# Altium PCB ATMEGA328 Control Board.PcbDoc (part 2 of 2)
Units mm, origin at the board's own origin, x right, y up, seen from the top; angles counter-clockwise.
Board outline 100 x 100 mm, 4 copper layers (Top Layer, GND, VCC, Bottom Layer), stack 1.586 mm thick; 96 components, 93 nets, 427 pads, 260 vias.
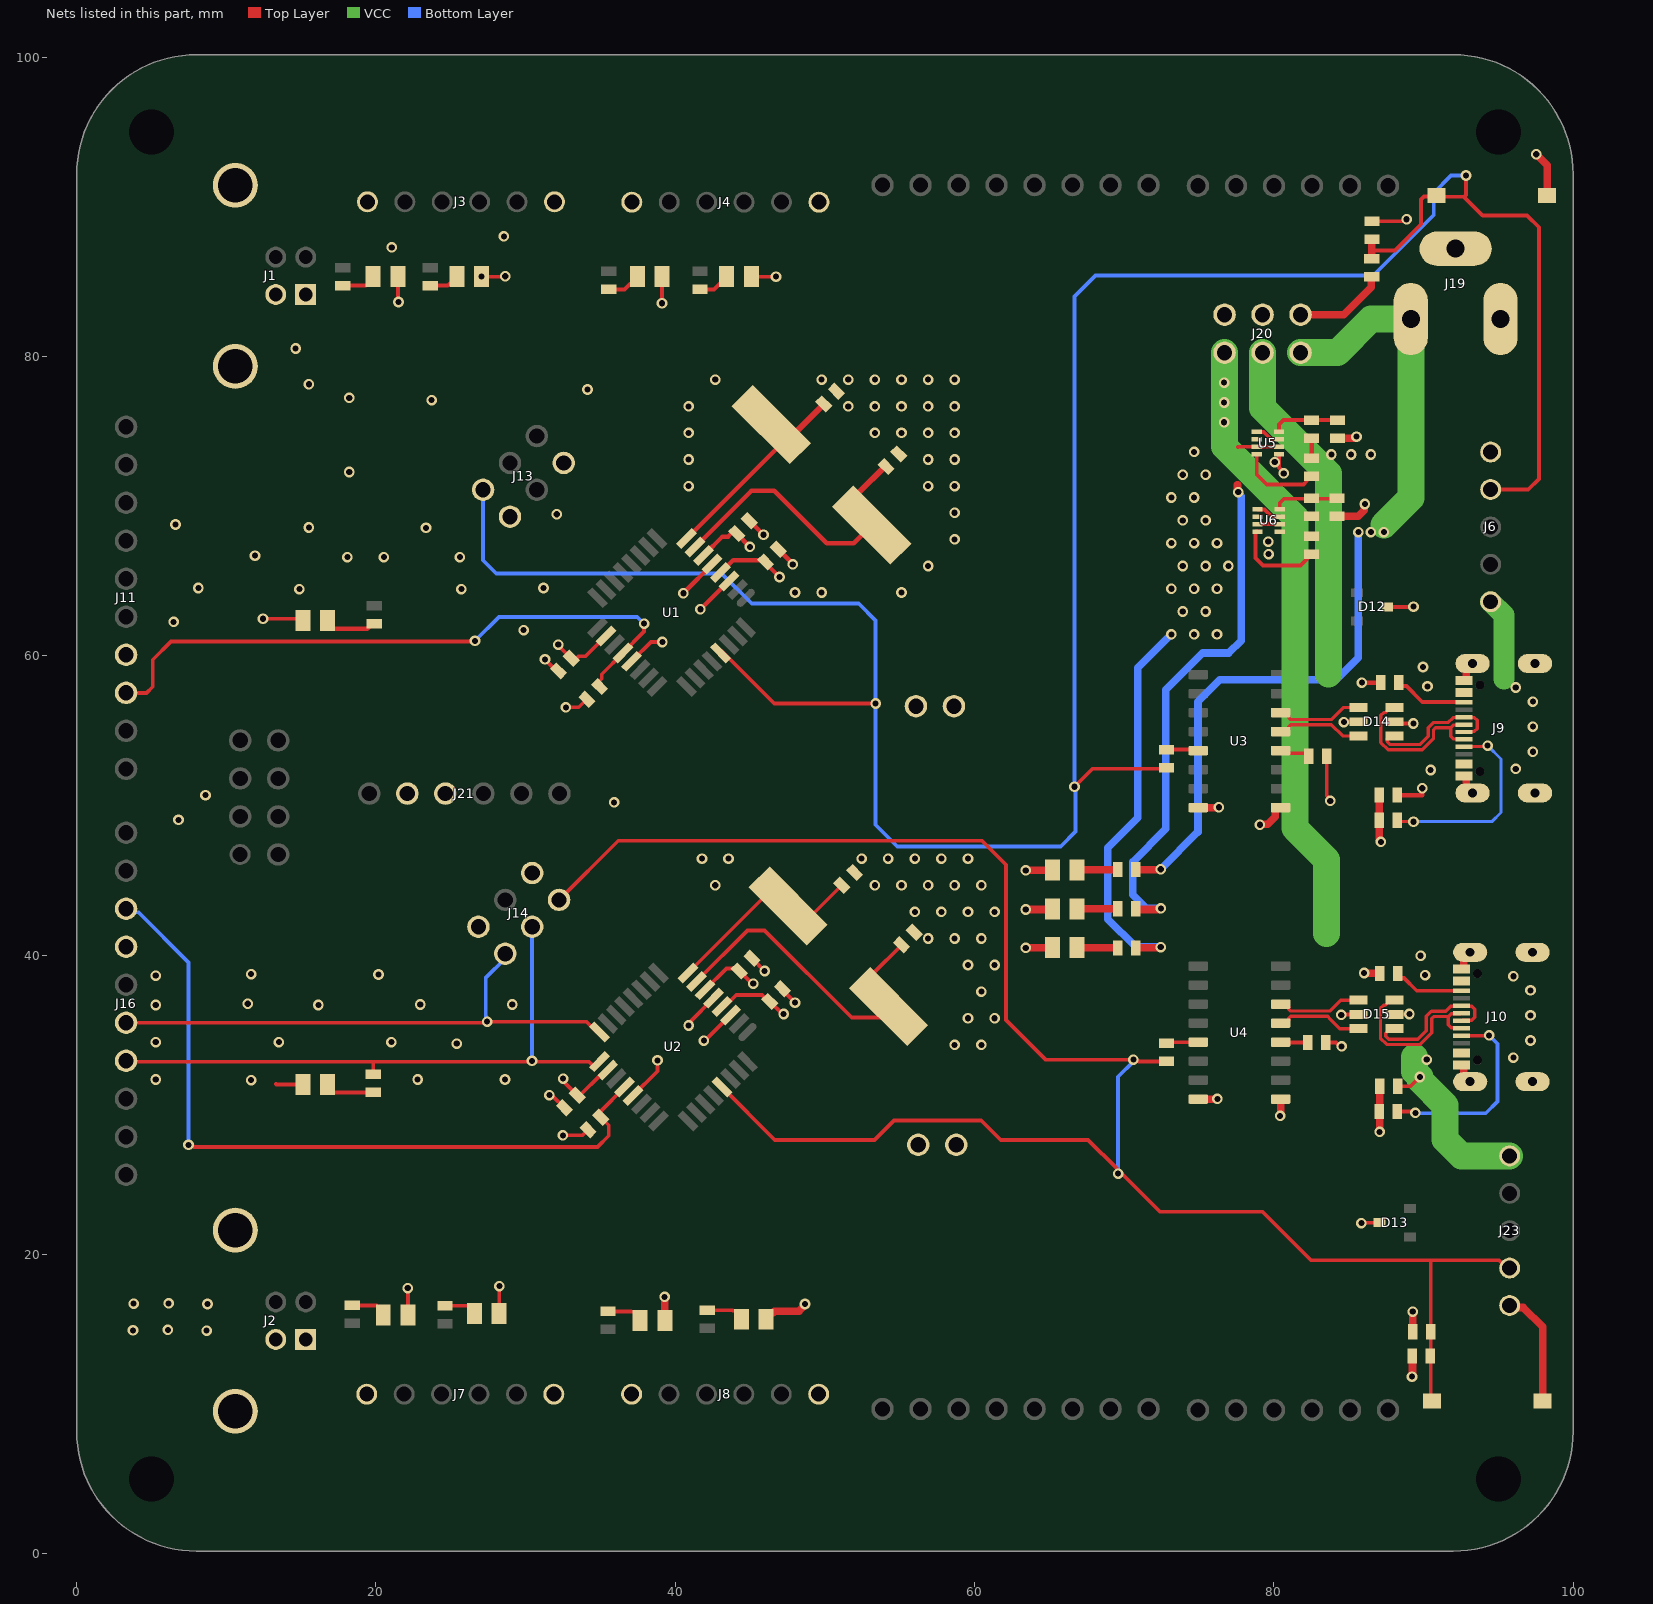
[diagram p4: the nets of this part, all layers, seen from the top]

## Via types
v1: diameter 0.711, hole 0.406, Top Layer to Bottom Layer, tented both sides, 260 vias

## Nets (pads, with @x,y where several pads share a name; then routed paths per layer and width w, separated by ;. In a path a pad name is that pad's centre, name@x,y a point inside that pad or via, vN(x,y) a via of type N, cw(c..) or ccw(c..) an arc to the next point about the centre after c; other vN are vias at no path point) (continued)
2D12/MISO: J14.1 J16.6 U2.16 | length 37.1
  Top Layer w0.254: J16.6@3.302,35.484 27.356,35.484 v1(27.432,35.56) 34.053,35.56 34.75,34.863 U2.16@34.924,34.863
  Bottom Layer w0.254: v1(27.432,35.56) 27.345,35.647 27.345,35.923 27.33,35.937 27.33,38.47 28.642,39.781 J14.1@28.642,40.105
2D13/SCK: J14.3 J16.7 R13.1 U2.17 | length 41.7
  Top Layer w0.254: J16.7@3.302,32.944 3.363,32.883 19.761,32.883 ; R13.1@19.812,32.029 19.812,32.832 19.761,32.883 ; U2.17@34.924,32.883 34.67,32.629 34.496,32.629 34.242,32.883 30.49,32.883 v1(30.429,32.944) 30.368,32.883 19.761,32.883
  Bottom Layer w0.254: v1(30.429,32.944) J14.3@30.429,41.892
+5: J1.1 J2.1 J3.1 J4.1 J5.1 J7.1 J8.1 J20.2 J20.4 J20.6 J21.2 J24.1 R1.1 R2.1 R9.1 U3.16 U4.16 U6.2 U6.7 | length 38.5
  Top Layer w0.254: U6.7@78.914,68.813 U6.2@80.394,68.813
  Top Layer w0.508: R9.1@70.78,40.488 72.335,40.488 72.386,40.538 v1(72.441,40.538) ; U4.16@74.949,30.378 76.2,30.378 v1(76.225,30.404) ; U3.16@74.949,49.86 76.302,49.86 v1(76.327,49.886) ; J20.6@81.788,82.804 84.684,82.804 86.512,84.633 86.512,85.35 86.516,85.354 R1.1@86.538,85.354 ; v1(89.23,11.836) 89.265,11.871 R2.1@89.265,13.208
  Bottom Layer w0.508: v1(72.441,40.538) 72.413,40.567 70.762,40.567 68.91,42.418 68.91,47.168 70.917,49.174 70.917,59.205 v1(73.152,61.44)
  other v1: 74.676,61.44 76.2,61.44 73.914,62.964 75.438,62.964 73.152,64.488 74.676,64.488 76.2,64.488 73.914,66.012 75.438,66.012 76.962,66.012 73.152,67.536 74.676,67.536 76.2,67.536 73.914,69.06 75.438,69.06 73.152,70.584 74.676,70.584 73.914,72.108 75.438,72.108 74.676,73.632
+5_C1: C8.2 C9.2 C10.2 J5.2 J13.2 U1.4 U1.6 U1.18 | length 13.1
  Top Layer w0.254: v1(32.182,60.757) 32.182,60.706 33.146,59.742 33.32,59.742 33.562,59.984 34.022,59.984 U1.18@35.483,61.444
  Top Layer w0.3: U1.6@41.995,66.818 43.155,67.978 43.529,67.978 43.91,68.359 C10.2@44.051,68.359 ; U1.4@43.127,65.687 43.164,65.687 43.86,66.383 45.715,66.383 45.749,66.418 45.891,66.418 C9.2@46.032,66.276 46.032,66.21 v1(46.965,65.278) ; C10.2@44.102,68.181 44.983,67.3 v1(44.983,67.285)
+5_C2: C5.2 C6.2 C7.2 J14.2 J24.2 U2.4 U2.6 U2.18 | length 13.4
  Top Layer w0.254: v1(32.512,31.75) 32.599,31.663 32.599,31.495 C5.2@33.444,30.65 ; C5.2@33.502,30.679 33.676,30.679 34.96,31.964 35.136,31.964 U2.18@35.49,32.317 ; U2.6@41.995,37.691 43.42,39.116 43.936,39.116 43.964,39.087 44.128,39.087 C7.2@44.157,39.116 ; U2.4@43.127,36.56 43.301,36.56 44.079,37.338 45.795,37.338 46.219,36.914 C6.2@46.312,36.914 47.157,36.068 v1(47.244,36.068) ; C7.2@44.138,39.087 45.125,38.1 v1(45.212,38.1)
AREF1: C11.1 J11.3 U1.20 | length 43.5
  Top Layer w0.254: J11.3@3.302,57.531 4.674,57.531 5.08,57.937 5.08,59.741 6.299,60.96 26.568,60.96 v1(26.619,61.011) ; C11.1@34.943,57.955 34.842,58.056 34.842,58.23 35.084,58.472 35.084,58.776 U1.20@36.513,60.205 ; U1.20@36.508,60.21 37.921,61.622 37.921,62.152 v1(37.922,62.154)
  Bottom Layer w0.254: v1(26.619,61.011) 28.219,62.611 37.465,62.611 v1(37.922,62.154)
AREF2: C12.1 J16.3 U2.20 | length 50.3
  Top Layer w0.254: v1(7.468,27.33) 7.555,27.243 7.78,27.243 7.845,27.178 34.798,27.178 35.56,27.94 35.56,28.636 C12.1@35.019,29.177 ; C12.1@34.968,29.38 34.968,29.533 U2.20@36.621,31.186
  Bottom Layer w0.254: J16.3@3.302,43.104 3.54,42.865 4.125,42.865 7.468,39.522 v1(7.468,27.33)
D1_N: D14.3 J9.A7 J9.B7 | length 11.3
  Top Layer w0.222: D14.3@88.069,56.551 87.769,56.551 87.433,56.215 87.339,56.215 87.155,56.031 87.155,54.209 87.636,53.727 89.908,53.727 90.672,54.491 90.672,55.066 90.802,55.196 91.815,55.196 ; J9.B7@92.7,54.416 92.664,54.452 91.999,54.452 91.815,54.636 91.815,55.196 ; J9.A7@92.7,55.416 92.664,55.38 91.999,55.38 91.815,55.196
D1_out_N: D14.4 U3.6 | length 5.8
  Top Layer w0.222: U3.6@80.449,56.21 80.794,56.21 80.993,56.011 80.993,55.88 81.123,55.75 83.839,55.75 84.64,56.551 D14.4@85.669,56.551
D1_out_P: D14.6 U3.5 | length 5.8
  Top Layer w0.222: U3.5@80.449,54.94 80.794,54.94 80.993,55.139 80.993,55.271 81.123,55.401 83.839,55.401 84.589,54.651 D14.6@85.669,54.651
D1_P: D14.1 J9.A6 J9.B6 | length 9.6
  Top Layer w0.222: D14.1@88.069,54.651 87.769,54.651 87.58,54.462 87.58,54.278 87.781,54.077 89.764,54.077 90.322,54.635 90.322,55.211 90.657,55.545 91.638,55.545 91.973,55.88 92.664,55.88 J9.B6@92.7,55.916 92.735,55.88 93.4,55.88 93.584,55.696 93.584,55.136 93.4,54.952 92.735,54.952 J9.A6@92.7,54.916
D2_N: D15.3 J10.A7 J10.B7 | length 11.7
  Top Layer w0.222: D15.3@88.069,36.993 87.769,36.993 87.433,36.657 87.339,36.657 87.126,36.444 87.126,34.445 87.536,34.035 89.774,34.035 90.545,34.806 90.545,35.772 90.675,35.903 91.657,35.903 ; J10.B7@92.541,35.122 92.505,35.158 91.841,35.158 91.657,35.342 91.657,35.903 ; J10.A7@92.541,36.122 92.505,36.087 91.841,36.087 91.657,35.903
D2_out_N: D15.4 U4.6 | length 5.8
  Top Layer w0.222: U4.6@80.449,36.728 80.794,36.728 80.993,36.529 80.993,36.398 81.123,36.268 83.737,36.268 84.462,36.993 D15.4@85.669,36.993
D2_out_P: D15.6 U4.5 | length 5.8
  Top Layer w0.222: U4.5@80.449,35.458 80.794,35.458 80.993,35.657 80.993,35.789 81.123,35.919 83.599,35.919 83.785,35.733 83.785,35.719 84.411,35.093 D15.6@85.669,35.093
D2_P: D15.1 J10.A6 J10.B6 | length 10.1
  Top Layer w0.222: D15.1@88.069,35.093 87.769,35.093 87.475,34.799 87.475,34.59 87.68,34.384 89.629,34.384 90.195,34.95 90.195,35.917 90.53,36.252 91.479,36.252 91.814,36.587 92.505,36.587 J10.B6@92.541,36.622 92.577,36.587 93.241,36.587 93.425,36.403 93.425,35.842 93.241,35.658 92.577,35.658 J10.A6@92.541,35.622
GND: C1.1 C2.1 C3.1 C4.1 C5.1 C6.1 C7.1 C8.1 C9.1 C10.1 C11.2 C12.2 C13.2 C14.2 C16.2 C17.2 C19.1 C20.1 D1.2 D2.2 D3.2 D4.2 D5.2 D6.2 D7.2 D8.2 D9.2 D10.2 D11.2 D12.3 D13.3 D14.2 D15.2 D16.2 D17.2 J1.4 J1.s1 J1.s2 J2.4 J2.s1 J2.s2 J3.6 J4.6 J6.1 J7.6 J8.6 J9.A1/B12 J9.B1/A12 J9.S1 J9.S2 J9.S3 J9.S4 J10.A1/B12 J10.B1/A12 J10.S1 J10.S2 J10.S3 J10.S4 J11.4 J13.6 J14.6 J16.4 J19.1 J19.3 J21.3 J23.5 R14.1 R15.2 R16.1 R17.2 R20.1 R23.1 S1.1 S2.1 U1.3 U1.5 U1.21 U2.3 U2.5 U2.21 U3.1 U4.1 U5.1 U6.1 | length 100.7
  Top Layer w0.254: v1(12.446,62.484) 14.752,62.484 15.125,62.857 D10.2@15.125,62.865 ; 13.31,31.394 13.335,31.369 D11.2@15.114,31.369 ; D3.2@21.462,85.344 21.462,83.747 21.507,83.702 v1(21.507,83.647) ; v1(22.123,17.755) 22.137,17.741 D6.2@22.137,15.951 ; D4.2@26.804,84.898 27.05,85.144 v1(27.05,85.344) 28.611,85.344 v1(28.637,85.369) ; D5.2@28.233,16.053 28.233,17.87 v1(28.245,17.882) ; v1@31.14,59.868 31.191,59.868 v1(31.293,59.766) 32.065,58.994 C8.1@32.197,58.994 ; v1(31.583,30.647) 31.671,30.559 31.838,30.559 C5.1@32.596,29.802 ; v1(32.487,27.965) 33.807,27.965 C12.2@34.171,28.329 ; v1(32.69,56.566) 33.553,56.566 C11.2@34.094,57.107 ; U2.21@37.187,30.62 38.811,32.244 v1(38.811,32.969) ; U1.21@37.187,59.747 38.374,60.935 v1(39.141,60.935) ; v1(39.116,83.566) D1.2@39.116,85.344 ; v1(40.894,35.306) 40.981,35.393 40.981,35.546 U2.5@42.561,37.126 ; v1(41.91,34.29) 41.988,34.29 U2.3@43.692,35.994 ; D2.2@45.084,85.344 v1(46.736,85.344) ; C7.1@45.128,39.794 v1(45.974,38.949) ; C6.1@47.16,37.762 47.16,37.676 v1(48.006,36.83) ; C1.1@54.933,73.414 C1.1@54.933,73.5 ; U5.1@80.337,73.474 80.337,72.581 80.66,72.258 v1(80.66,72.203) ; C16.2@83.48,34.163 84.154,34.163 84.408,33.909 v1(84.531,33.909) ; C13.2@83.531,53.289 83.531,50.679 83.769,50.441 v1(83.769,50.317) ; v1(85.852,22.098) 85.877,22.123 D13.3@87.071,22.123 ; C19.1@86.563,89.043 88.614,89.043 88.751,89.179 v1(88.875,89.179) ; D12.3@87.579,63.271 89.306,63.271 v1(89.332,63.297) ; D15.2@88.069,36.043 88.082,36.055 89.04,36.055 v1(89.052,36.068) ; D14.2@88.12,55.474 88.132,55.486 v1(89.319,55.486)
  Top Layer w0.3: v1(40.538,64.186) 42.561,66.208 U1.5@42.561,66.253 ; v1(41.681,63.119) 41.69,63.119 U1.3@43.692,65.121 ; C10.1@44.95,69.03 44.966,69.03 v1(45.898,68.097) ; C9.1@46.881,67.125 47.854,66.152 v1(47.854,66.116) ; v1(85.877,58.217) R15.2@87.157,58.217
  Top Layer w0.508: v1(39.294,17.17) 39.307,17.157 D9.2@39.307,15.596 ; D8.2@46.075,15.672 46.075,15.872 46.321,16.118 46.531,16.118 46.618,16.205 48.267,16.205 48.565,16.503 48.565,16.531 48.666,16.633 v1(48.666,16.688) ; v1(63.424,43.053) D17.2@65.275,43.053 ; v1@63.449,45.669 63.465,45.685 D16.2@65.208,45.685 ; v1@63.5,40.488 63.516,40.504 D7.2@65.208,40.504 ; v1(79.07,48.717) 79.109,48.756 79.592,48.756 80.082,49.246 80.082,49.804 80.138,49.86 U3.1@80.449,49.86 ; v1(80.416,29.261) 80.449,29.293 U4.1@80.449,30.378 ; R23.1@84.226,69.326 85.633,69.326 86.042,69.735 86.042,70.116 v1(86.081,70.155) ; R20.1@84.252,74.559 85.375,74.559 85.467,74.651 v1(85.522,74.651) ; v1(86.03,38.811) 86.055,38.786 R17.2@87.081,38.786 ; C14.2@87.055,50.698 R14.1@87.055,49.022 87.055,47.721 87.147,47.629 v1(87.147,47.574) ; v1(87.071,28.194) 87.081,28.204 C17.2@87.081,31.242 ; v1(89.281,16.18) 89.291,16.17 C20.1@89.291,14.834 ; J10.A1/B12@92.541,32.672 92.655,32.672 92.701,32.626 92.701,31.729 92.882,31.547 J10.S1@93.121,31.547 ; J10.B1/A12@92.541,39.072 92.655,39.072 92.701,39.118 92.701,40.016 92.882,40.197 J10.S2@93.121,40.197 ; J9.A1/B12@92.7,51.966 92.814,51.966 92.86,51.92 92.86,51.022 93.041,50.841 J9.S1@93.28,50.841 ; J9.B1/A12@92.7,58.366 92.814,58.366 92.86,58.412 92.86,59.31 93.041,59.491 J9.S2@93.28,59.491 ; J23.5@95.758,16.59 95.892,16.456 96.676,16.456 97.959,15.172 S2.1@97.959,10.211 ; v1(97.536,93.523) 98.264,92.795 S1.1@98.264,90.78
  other v1: 8.687,14.91 3.759,14.935 6.096,14.961 8.738,16.688 3.81,16.713 6.147,16.739 11.659,31.648 5.283,31.699 22.784,31.699 28.626,31.699 58.674,34.008 60.452,34.008 25.4,34.087 5.283,34.188 13.513,34.188 21.031,34.188 59.563,35.786 61.341,35.786 5.283,36.678 16.154,36.678 22.962,36.703 29.108,36.703 11.43,36.754 60.452,37.564 5.283,38.633 20.168,38.71 11.659,38.735 59.563,39.342 61.341,39.342 63.424,40.488 56.896,41.12 58.674,41.12 60.452,41.12 56.007,42.898 57.785,42.898 59.563,42.898 61.341,42.898 42.672,44.676 53.34,44.676 55.118,44.676 56.896,44.676 58.674,44.676 60.452,44.676 63.424,45.669 41.783,46.454 43.561,46.454 52.451,46.454 54.229,46.454 56.007,46.454 57.785,46.454 59.563,46.454 6.807,49.047 35.916,50.216 8.611,50.698 90.272,57.963 89.967,59.258 29.87,61.722 6.477,62.281 48.006,64.234 49.784,64.234 55.118,64.234 14.884,64.465 25.705,64.465 8.128,64.541 31.191,64.541 56.896,66.012 18.085,66.599 20.523,66.599 25.603,66.599 11.913,66.7 79.654,66.802 79.629,67.64 58.674,67.79 23.343,68.555 15.519,68.58 6.604,68.783 32.08,69.469 58.674,69.568 40.894,71.346 56.896,71.346 58.674,71.346 18.212,72.288 80.061,72.949 40.894,73.124 56.896,73.124 58.674,73.124 40.894,74.902 53.34,74.902 55.118,74.902 56.896,74.902 58.674,74.902 40.894,76.68 51.562,76.68 53.34,76.68 55.118,76.68 56.896,76.68 58.674,76.68 23.724,77.089 18.212,77.241 34.138,77.8 15.519,78.156 42.672,78.458 49.784,78.458 51.562,78.458 53.34,78.458 55.118,78.458 56.896,78.458 58.674,78.458 14.63,80.543 21.057,87.3 28.55,88.036
NetC1_2: C1.2 U1.7 Y1.2 | length 20.3
  Top Layer w0.3: U1.7@41.43,67.384 45.089,71.044 46.609,71.044 50.114,67.539 51.93,67.539 Y1.2@53.133,68.741
  Top Layer w0.406: Y1.2@53.133,68.741 52.179,69.695 52.179,70.822 C1.2@54.079,72.723
NetC2_2: C2.2 U1.8 Y1.1 | length 14.1
  Top Layer w0.3: U1.8@40.864,67.95 46.793,73.879 Y1.1@46.793,75.081
  Top Layer w0.406: Y1.1@46.415,75.459 46.924,74.95 48.051,74.95 C2.2@49.943,76.841
NetC3_2: C3.2 U2.7 Y2.2 | length 21.4
  Top Layer w0.254: U2.7@41.43,38.257 44.829,41.656 45.974,41.656 51.791,35.839 53.911,35.839 Y2.2@54.87,36.799 ; Y2.2@53.143,38.043 53.143,38.7 C3.2@55.164,40.721 ; Y2.2@53.442,37.135 Y2.2@53.639,37.332
NetC4_2: C4.2 U2.8 Y2.1 | length 13.7
  Top Layer w0.254: U2.8@40.864,38.823 Y2.1@46.679,44.638 ; Y2.1@46.679,44.761 Y2.1@47.008,44.432 ; Y2.1@47.365,43.999 48.557,42.807 49.258,42.807 C4.2@51.13,44.679
NetC13_1: C13.1 U3.4 | length 1.9
  Top Layer w0.254: U3.4@80.449,53.67 80.626,53.492 C13.1@82.306,53.492
NetC15_1: C15.1 U3.13 | length 2.2
  Top Layer w0.254: C15.1@72.822,53.737 74.882,53.737 U3.13@74.949,53.67
NetC16_1: C16.1 U4.4 | length 1.8
  Top Layer w0.254: U4.4@80.449,34.188 80.474,34.163 C16.1@82.28,34.163
NetC18_1: C18.1 U4.13 | length 1.9
  Top Layer w0.254: C18.1@72.822,34.103 72.908,34.188 U4.13@74.72,34.188
NetD1_1: D1.1 R3.2 | length 2.4
  Top Layer w0.254: R3.2@35.56,84.49 36.612,84.49 37.02,84.898 37.22,84.898 37.466,85.144 D1.1@37.466,85.344
NetD2_1: D2.1 R4.2 | length 2.2
  Top Layer w0.254: R4.2@41.656,84.49 42.58,84.49 42.988,84.898 43.188,84.898 43.434,85.144 D2.1@43.434,85.344
NetD3_1: D3.1 R5.2 | length 2.4
  Top Layer w0.254: R5.2@17.78,84.744 19.29,84.744 19.317,84.771 19.439,84.771 19.812,85.144 D3.1@19.812,85.344
NetD4_1: D4.1 R6.2 | length 2.1
  Top Layer w0.254: R6.2@23.622,84.744 24.8,84.744 24.954,84.898 25.154,84.898 25.4,85.144 D4.1@25.4,85.344
NetD5_1: D5.1 R7.2 | length 2.3
  Top Layer w0.254: R7.2@24.613,16.577 26.21,16.577 26.583,16.204 D5.1@26.583,16.053
NetD6_1: D6.1 R8.2 | length 2.5
  Top Layer w0.254: R8.2@18.415,16.602 20.036,16.602 20.487,16.151 D6.1@20.487,15.951
NetD7_1: D7.1 R9.2 | length 2.7
  Top Layer w0.508: D7.1@66.858,40.504 66.874,40.488 R9.2@69.58,40.488
NetD8_1: D8.1 R10.2 | length 2.7
  Top Layer w0.254: R10.2@42.139,16.272 43.825,16.272 43.852,16.245 44.052,16.245 44.425,15.872 D8.1@44.425,15.672
NetD9_1: D9.1 R11.2 | length 2.5
  Top Layer w0.254: R11.2@35.509,16.196 37.057,16.196 37.084,16.169 37.284,16.169 37.657,15.796 D9.1@37.657,15.596
NetD10_1: D10.1 R12.2 | length 3.8
  Top Layer w0.3: D10.1@16.775,62.865 16.775,62.665 D10.1@17.125,62.315 ; D10.1@17.125,61.807 19.412,61.807 19.588,61.983 R12.2@19.588,62.165 ; R12.2@19.563,62.216 19.663,62.316 R12.2@19.863,62.316
NetD11_1: D11.1 R13.2 | length 3.4
  Top Layer w0.254: D11.1@16.764,31.369 16.764,31.202 17.137,30.829 R13.2@19.812,30.829
NetD16_1: D16.1 R24.2 | length 2.7
  Top Layer w0.508: D16.1@66.858,45.685 66.892,45.72 R24.2@69.504,45.72
NetD17_1: D17.1 R25.2 | length 2.7
  Top Layer w0.508: D17.1@66.925,43.053 66.975,43.104 R25.2@69.58,43.104
NetJ9_A5: J9.A5 R14.2 | length 13.7
  Top Layer w0.203: R14.2@88.255,49.022 88.357,48.92 v1(89.332,48.92) ; J9.A5@92.7,53.916 92.719,53.936 93.821,53.936 ; 93.821,53.936 94.221,53.936 v1(94.285,54)
  Bottom Layer w0.203: v1(89.332,48.92) 94.564,48.92 95.174,49.53 95.174,53.111 v1(94.285,54)
NetJ9_B5: J9.B5 R15.1 | length 5
  Top Layer w0.254: R15.1@88.357,58.217 88.357,58.08 88.457,57.98 88.857,57.98 89.921,56.916 J9.B5@92.7,56.916
NetJ10_A5: J10.A5 R16.2 | length 13.6
  Top Layer w0.254: R16.2@88.256,29.566 89.233,29.566 89.335,29.464 v1(89.459,29.464) ; J10.A5@92.541,34.622 94.363,34.622 v1(94.386,34.646)
  Bottom Layer w0.254: v1(89.459,29.464) 89.484,29.439 94.158,29.439 94.945,30.226 94.945,34.087 v1(94.386,34.646)
NetJ10_B5: J10.B5 R17.1 | length 4.9
  Top Layer w0.254: R17.1@88.281,38.786 88.281,38.599 88.404,38.476 88.702,38.476 89.555,37.622 J10.B5@92.541,37.622
NetR18_1: R18.1 U5.8 | length 5.6
  Top Layer w0.254: U5.8@78.857,73.474 78.857,72.12 79.527,71.45 81.982,71.45 82.202,71.67 82.202,71.87 82.325,71.993 R18.1@82.525,71.993
NetR21_1: R21.1 U6.8 | length 6.2
  Top Layer w0.254: U6.8@78.914,68.313 78.788,68.313 78.765,68.29 78.765,66.548 79.273,66.04 81.778,66.04 R21.1@82.525,66.786
PR1: R19.2 R20.2 U5.4 | length 4.5
  Top Layer w0.254: U5.4@80.337,74.974 80.337,75.46 80.635,75.759 R19.2@82.525,75.759 R20.2@84.252,75.759
PR2: R22.2 R23.2 U6.4 | length 4.5
  Top Layer w0.254: U6.4@80.394,69.813 80.394,70.209 80.686,70.501 82.525,70.501 R23.2@84.379,70.501
reset1: C15.2 C19.2 J6.2 J13.5 R1.2 S1.2 U1.29 | length 182.8
  Top Layer w0.254: U1.29@43.127,60.313 46.62,56.82 v1(53.391,56.82) ; v1(66.675,51.257) 67.878,52.461 72.746,52.461 C15.2@72.822,52.537 ; 86.547,87.097 88.087,87.097 89.84,88.849 89.84,90.5 90.032,90.692 90.777,90.692 S1.2@90.864,90.78 90.966,90.678 92.71,90.678 ; v1(92.837,92.1) 92.837,90.805 92.71,90.678 ; J6.2@94.488,71.12 97.003,71.12 97.714,71.831 97.714,88.646 96.926,89.433 93.955,89.433 92.71,90.678
  Top Layer w0.508: R1.2@86.538,86.554 86.538,87.097 86.538,87.839 86.542,87.843 C19.2@86.563,87.843
  Bottom Layer w0.254: J13.5@27.16,71.102 27.16,66.388 28.042,65.507 43.101,65.507 45.113,63.494 52.264,63.494 53.391,62.367 v1(53.391,56.82) 53.391,48.717 54.839,47.269 65.761,47.269 66.751,48.26 66.751,51.181 v1(66.675,51.257) 66.675,84.023 68.072,85.42 86.639,85.42 90.691,89.471 90.691,90.945 91.846,92.1 v1(92.837,92.1)
reset2: C18.2 C20.2 J14.5 J23.4 R2.2 S2.2 U2.29 | length 130.3
  Top Layer w0.254: J14.5@32.234,43.697 36.188,47.65 60.503,47.65 62.103,46.05 62.103,35.662 64.745,33.02 v1(70.612,33.02) 70.699,32.933 70.959,32.933 70.989,32.903 C18.2@72.314,32.903 ; U2.29@43.127,31.186 46.652,27.661 53.315,27.661 54.61,28.956 60.452,28.956 61.747,27.661 67.589,27.661 69.509,25.741 69.509,25.487 69.683,25.313 69.937,25.313 72.39,22.86 79.248,22.86 82.492,19.616 90.583,19.616 ; S2.2@90.559,10.211 90.551,10.211 90.491,10.271 C20.2@90.491,14.834 90.491,19.523 90.583,19.616 ; J23.4@95.758,19.09 95.562,19.09 95.036,19.616 90.583,19.616
  Bottom Layer w0.254: v1(69.596,25.4) 69.596,31.881 70.612,32.897 v1(70.612,33.02)
Vbus1: C14.1 D14.5 J6.5 J9.A4/B9 J9.B4/A9 J20.3 R18.2 R19.1 U5.3 U5.5 | length 35
  Top Layer w0.09: J9.B4/A9@92.7,57.566 J9.B4/A9@92.746,57.519
  Top Layer w0.254: U5.5@78.857,74.974 78.877,74.954 79.329,74.954 79.792,74.491 80.32,74.491 U5.3@80.337,74.474 ; D14.5@85.847,55.601 D14.5@85.859,55.588
  Top Layer w0.3: R19.1@82.509,74.474 82.525,74.459 R18.2@82.525,73.193 ; v1(84.684,55.575) 84.696,55.588 85.656,55.588 D14.5@85.669,55.601 ; C14.1@88.255,50.698 89.916,50.698 v1(89.916,51.156)
  VCC w1.4: J6.5@94.488,63.62 95.377,62.731 95.377,58.445
  VCC w1.8: J20.3@79.248,80.264 79.248,76.581 83.642,72.187 83.642,58.797
  other v1: 90.475,52.375 96.164,52.451 97.307,53.594 97.307,55.27 97.307,56.947 96.164,57.887 83.845,73.457 85.166,73.457 86.487,73.457
Vbus2: C17.1 D15.5 J10.A4/B9 J10.B4/A9 J20.1 J23.1 U5.6 | length 55.1
  Top Layer w0.254: v1(84.506,36.017) 84.519,36.03 85.656,36.03 D15.5@85.669,36.043 ; C17.1@88.332,31.242 89.137,31.242 v1(89.757,31.862)
  VCC w1.8: J20.1@76.708,80.264 76.708,78.257 76.708,76.937 76.708,75.616 76.708,73.99 81.407,69.291 81.407,48.489 83.515,46.38 83.515,41.437 ; 89.408,32.226 89.408,33.188 ; v1(89.757,31.862) 89.757,31.655 91.44,29.972 91.44,27.686 92.536,26.59 J23.1@95.758,26.59
  other v1: 90.221,33.02 96.006,33.157 97.149,34.3 97.149,35.977 97.149,37.653 96.006,38.593 90.113,38.669 89.808,39.965 76.683,75.616 76.683,76.937 76.683,78.257
Vin: J19.2 J20.5 R21.2 R22.1 R24.1 U6.3 U6.5 | length 58.8
  Top Layer w0.254: U6.5@78.914,69.813 78.934,69.793 79.386,69.793 79.847,69.332 80.375,69.332 U6.3@80.394,69.313
  Top Layer w0.508: R24.1@70.704,45.72 R24.1@70.78,45.72 72.415,45.72 v1(72.441,45.745)
  VCC w1.8: J20.5@81.788,80.264 84.252,80.264 86.498,82.511 J19.2@89.151,82.511 89.151,70.558 87.351,68.758
  Bottom Layer w0.508: v1(72.441,45.745) 74.93,48.235 74.93,56.947 76.378,58.395 84.176,58.395 85.649,59.868 v1(85.649,68.275)
  other v1: 86.487,68.275 87.351,68.275
Vout: R25.1 U5.2 U5.7 U6.6 | length 37.9
  Top Layer w0.254: 77.597,73.965 77.606,73.974 U5.7@78.857,73.974 ; 79.223,73.965 79.232,73.974 U5.2@80.337,73.974
  Top Layer w0.508: R25.1@70.755,43.053 72.319,43.053 72.395,43.129 v1(72.45,43.129) ; 77.572,71.45 77.572,71.135 77.583,71.124 77.583,70.98 v1(77.622,70.942)
  Bottom Layer w0.508: v1(72.45,43.129) 71.476,43.129 70.561,44.044 70.561,46.228 72.787,48.454 72.787,57.725 75.26,60.198 76.995,60.198 77.826,61.029 77.826,70.683 77.622,70.887 v1(77.622,70.942)
pads on no net: J9. J9.A8 J9.B8 J10. J10.A8 J10.B8 J21.1 J21.6 U3.7 U3.8 U3.9 U3.10 U3.11 U3.12 U3.14 U3.15 U4.7 U4.8 U4.9 U4.10 U4.11 U4.12 U4.14 U4.15

## Polygon pours and split planes (outlines as drawn)
+5 on VCC "+5_L03_P019" (solid, remove dead copper, pour order 19): 0.076,100.28 0.279,100.077 99.923,100.077 99.923,0.077 99.898,0.102 -0.077,0.102
+5_C2 on VCC "+5_C2_L03_P017" (solid, pour order 17): 24.359,36.728 24.359,41.402 31.533,48.576 37.505,48.576 57.099,28.981 57.099,26.808 48.198,17.907 43.18,17.907
Vbus1 on VCC "VBUS1_L03_P000" (solid, pour order 0): 82.804,63.5 84.48,63.5 84.48,62.306 ccw(c86.868,62.306) 86.868,59.919 98.425,59.919 98.425,50.444 86.208,50.444 cw(c86.208,53.848) 82.804,53.848
Vbus2 on VCC "VBUS2_L03_P003" (solid, pour order 3): 82.645,44.206 84.322,44.206 84.322,43.013 ccw(c86.709,43.013) 86.709,40.625 98.266,40.625 98.266,31.151 86.049,31.151 cw(c86.049,34.554) 82.645,34.554
+5_C1 on VCC "+5_C1_L03_P016" (solid, pour order 16): 24.359,67.64 24.359,71.831 32.029,79.502 36.119,79.502 57.048,58.572 57.048,56.159 51.029,50.14 41.859,50.14
GND on Top Layer "GND_L01_P023" (solid, pour order 23): 39.268,38.989 39.446,39.167 39.446,45.618 41.478,47.65 59.792,47.65 61.747,45.695 61.747,34.569 59.36,32.182 45.946,32.182
GND on Top Layer "GND_L01_P022" (solid, pour order 22): 39.573,67.589 39.573,77.47 43.053,80.95 60.223,80.95 60.223,67.132 56.134,63.043 56.134,62.738 44.679,62.738 44.196,63.221
GND on Top Layer "GND_L01_P021" (solid, pour order 21): 3.143,30.829 33.971,30.829 36.969,33.828 31.483,39.314 2.648,39.314 1.741,38.4 1.785,32.178
GND on Top Layer "GND_L01_P020" (solid, pour order 20): 3,61.265 34.747,61.265 37.287,63.805 31.801,69.291 2.966,69.291 2.059,68.377 2.103,62.155
GND on Top Layer "GND_L01_P025" (solid, pour order 25): 79.419,73.589 80.816,73.589 80.994,73.411 80.994,72.7 81.324,72.37 81.324,71.557 79.343,71.557 78.988,71.913 78.988,73.157
GND on Top Layer "GND_L01_P024" (solid, pour order 24): 79.477,68.428 80.874,68.428 81.051,68.25 81.051,67.539 81.382,67.208 81.382,66.396 79.4,66.396 79.045,66.751 79.045,67.996
Vbus1 on Top Layer "VBUS1_L01_P002" (solid, remove dead copper, pour order 2): 91.288,52.471 90.805,51.988 90.805,50.439 89.281,50.439 89.281,51.841 90.52,53.08 91.237,53.08 98.425,53.08 98.425,51.887 95.529,51.887 94.945,52.471
+5 on Top Layer "+5_L01_P010" (solid, pour order 10): 79.197,68.732 79.172,68.707 78.283,68.707 78.003,68.428 78.003,66.952 78.003,63.779 77.14,62.916 77.14,59.868 73.635,59.868 72.441,61.062 72.441,73.076 74.168,74.803 75.692,74.803 76.479,74.016 76.479,69.444 76.987,68.936 79.198,68.936
Vbus2 on Top Layer "VBUS2_L01_P008" (solid, pour order 8): 95.904,39.152 98.266,39.152 98.266,32.593 95.904,32.593
Vbus2 on Top Layer "VBUS2_L01_P007" (solid, remove dead copper, pour order 7): 91.129,33.177 90.646,32.695 90.646,31.145 89.122,31.145 89.122,32.531 90.378,33.787 91.078,33.787 98.266,33.787 98.266,32.593 95.371,32.593 94.786,33.177
Vbus2 on Top Layer "VBUS2_L01_P006" (solid, pour order 6): 91.129,38.568 90.646,39.05 90.646,40.6 89.122,40.6 89.122,38.847 90.011,37.958 91.078,37.958 98.266,37.958 98.266,39.152 95.371,39.152 94.786,38.568
Vbus1 on Top Layer "VBUS1_L01_P004" (solid, pour order 4): 96.063,58.445 98.425,58.445 98.425,51.887 96.063,51.887
Vbus1 on Top Layer "VBUS1_L01_P001" (solid, pour order 1): 91.288,57.861 90.805,58.344 90.805,59.893 89.281,59.893 89.281,58.141 90.17,57.252 91.237,57.252 98.425,57.252 98.425,58.445 95.529,58.445 94.945,57.861
GND on GND "GND_L02_P015" (solid, pour order 15): 7.904,100.178 92,100.178 cw(c92,92.178) 100,92.178 100,8.178 cw(c92.025,8.178) 92.025,0.203 7.962,0.203 cw(c7.962,8.154) 0.012,8.166 0.141,92.426 cw(c7.904,92.415)
GND on Bottom Layer "GND_L04_P026" (solid, remove dead copper, pour order 26): -0.076,100.66 0.127,100.457 99.771,100.457 99.771,0.457 99.746,0.483 -0.229,0.483

## Keep-outs
Keep-Out Layer:
  the board outline again, w0.254

## Other copper
Top Layer:
  rectangle net Vin: 85.166,67.818 87.706,68.732
  pour cut-out: 45.364,79.07 42.088,75.794 42.088,73.635 43.561,72.161 39.751,68.351 39.751,67.259 40.716,66.294 41.656,66.294 45.542,70.18 51.384,64.338 53.975,64.338 57.125,67.488 57.125,69.875 47.93,79.07
  pour cut-out: 46.158,46.99 43.509,44.341 43.509,42.817 39.61,38.918 39.61,38.004 40.474,37.14 41.337,37.14 45.262,41.065 53.021,33.305 56.45,33.305 58.813,35.667 58.813,37.851 49.674,46.99
  pour cut-out: 44.412,72.352 39.751,67.691 39.751,67.259 40.716,66.294 41.099,66.294 45.849,71.044
  region net Vout: 79.204,69.184 77.348,69.184 76.942,69.591 76.942,73.665 77.376,74.1 77.927,74.1 79.151,74.1 79.151,73.837 78.409,73.837 78.156,73.584 78.156,69.774 78.486,69.444 79.204,69.444
  region net Vin: 80.093,69.184 80.093,69.438 80.829,69.438 81.109,69.642 83.166,69.642 83.166,69.184 83.166,69.083 83.522,68.727 87.122,68.727 87.122,67.818 81.84,67.818 81.54,68.118 81.54,68.905 81.261,69.184 80.702,69.184
  region net Vbus2: 79.146,74.346 76.937,74.346 75.87,75.413 75.87,81.128 77.546,81.128 77.546,75.108 78.054,74.6 79.146,74.6
  region net Vbus1: 80.035,74.346 80.035,74.6 80.772,74.6 81.051,74.803 83.109,74.803 83.109,74.346 83.109,74.244 83.464,73.889 87.605,73.889 87.605,72.923 81.839,72.923 81.483,73.279 81.483,74.066 81.204,74.346 80.645,74.346
GND:
  pour cut-out: 45.364,79.07 42.088,75.794 42.088,73.635 43.561,72.161 39.751,68.351 39.751,67.259 40.716,66.294 41.656,66.294 45.542,70.18 51.384,64.338 53.975,64.338 57.125,67.488 57.125,69.875 47.93,79.07
  pour cut-out: 46.595,47.39 43.509,44.304 43.509,42.78 39.61,38.881 39.61,37.967 40.474,37.103 41.337,37.103 45.262,41.027 53.021,33.268 56.45,33.268 58.813,35.63 58.813,37.814 49.237,47.39
VCC:
  rectangle net Vin: 85.166,67.818 87.681,69.596
  rectangle net Vbus1: 82.982,72.365 87.605,73.914
  pour cut-out: 45.364,79.07 42.088,75.794 42.088,73.635 43.561,72.161 39.751,68.351 39.751,67.259 40.716,66.294 41.656,66.294 45.542,70.18 51.384,64.338 53.975,64.338 57.125,67.488 57.125,69.875 47.93,79.07
  pour cut-out: 46.533,47.269 43.447,44.183 43.447,42.659 39.548,38.76 39.548,37.846 40.411,36.982 41.275,36.982 45.199,40.907 52.959,33.147 56.388,33.147 58.75,35.509 58.75,37.694 49.174,47.269
Bottom Layer:
  pour cut-out: 46.66,48.158 43.129,44.628 43.129,43.205 43.764,42.57 39.853,38.659 39.853,37.541 40.411,36.982 41.275,36.982 45.199,40.907 53.619,32.487 55.728,32.487 58.75,35.509 58.75,37.694 48.285,48.158
  pour cut-out: 71.673,74.365 74.752,77.445 74.752,82.829 76.2,84.277 83.922,84.277 83.922,77.47 80.01,73.558 80.01,59.503 71.673,59.414
  pour cut-out: 45.364,79.07 42.088,75.794 42.088,73.635 43.561,72.161 39.751,68.351 39.751,67.259 40.716,66.294 41.656,66.294 45.542,70.18 51.384,64.338 53.975,64.338 57.125,67.488 57.125,69.875 47.93,79.07

## Silkscreen, mask and mechanical layers (free items; w line width, h text height)
Top Overlay:
  drawing of 29 lines, arcs and shapes, not listed
  text "M1_F" at 21.429,97.206 h1.02 r270
  text "M1_B" at 23.842,97.206 h1.02 r270
  text "1A3" at 26.467,97.206 h1.02 r270
  text "1A4" at 28.753,97.206 h1.02 r270
  text "GND" at 31.394,97.206 h1.02 r270
  text "+5" at 36.5,97.206 h1.02 r270
  text "M2_F" at 39.006,97.206 h1.02 r270
  text "M2_B" at 41.317,97.206 h1.02 r270
  text "1A0" at 44.094,97.206 h1.02 r270
  text "1A1" at 46.355,97.206 h1.02 r270
  text "GND" at 48.946,97.206 h1.02 r270
  text "1D7" at 53.442,97.18 h1.02 r270
  text "1D6" at 55.956,97.18 h1.02 r270
  text "1D5" at 58.5,97.18 h1.02 r270
  text "1D4" at 61.029,97.18 h1.02 r270
  text "1D3" at 63.805,97.18 h1.02 r270
  text "1D2" at 66.167,97.18 h1.02 r270
  text "1D1" at 68.656,97.18 h1.02 r270
  text "1D0" at 71.044,97.18 h1.02 r270
  text "1A5" at 74.27,97.18 h1.02 r270
  text "1A4" at 76.86,97.18 h1.02 r270
  text "1A3" at 79.451,97.18 h1.02 r270
  text "1A2" at 82.042,97.18 h1.02 r270
  text "1A1" at 84.633,97.18 h1.02 r270
  text "1A0" at 87.224,97.18 h1.02 r270
  text "+5" at 18.491,96.19 h1.02
  text "RST1" at 89.687,94.717 h1.02
  text "PWM3" at 56.032,89.002 h1.02 r270
  text "PWM2" at 58.576,89.002 h1.02 r270
  text "INT1" at 63.66,89.002 h1.02 r270
  text "INT0" at 66.167,89.002 h1.02 r270
  text "TX1" at 68.769,89.002 h1.02 r270
  text "RX1" at 71.298,89.002 h1.02 r270
  text "+5" at 69.469,83.185 h1.02
  text "Motor_1" at 26.238,81.788 h2.54 r180
  text "Motor_2" at 51.918,81.788 h2.54 r180
  text "VB2" at 69.774,81.737 h1.02 r270
  text "VIN" at 72.619,81.636 h1.02 r270
  text "VB1" at 67.031,81.585 h1.02 r270
  text "MI" at 27.063,77.038 h1.02 r315
  text "SCK" at 25.209,75.336 h1.02 r315
  text "1D8" at 5.944,74.905 h1.02
  text "GND" at 98.704,73.711 h1.02 r90
  text "RST" at 23.533,73.482 h1.02 r315
  text "PWM0 (1D9)" at 5.867,72.238 h1.02
  text "+5V_C" at 33.254,71.392 h1.02 r315
  text "RST" at 98.755,70.333 h1.02 r90
  text "PWM1 (1D10)" at 5.893,69.571 h1.02
  text "MO" at 32.169,68.783 h1.02 r315
  text "MO" at 0.559,68.428 h1.02 r270
  text "TX" at 98.806,67.742 h1.02 r90
  text "1D11" at 5.893,67.132 h1.02
  text "GND" at 30.238,67.107 h1.02 r315
  text "MI" at 0.533,65.761 h1.02 r270
  text "RX" at 98.755,65.278 h1.02 r90
  text "1D12" at 5.893,64.643 h1.02
  text "C1_UART" at 90.044,64.084 h2.54 r90
  text "SCK" at 0.508,63.678 h1.02 r270
  text "1D13" at 5.893,62.255 h1.02
  text "V_B2" at 98.84,60.604 h1.02 r90
  text "GND" at 5.944,59.792 h1.02
  text "AREF1" at 5.944,57.226 h1.02
  text "1A6" at 5.944,54.737 h1.02
  text "Bluetooth" at 36.408,54.026 h2.54 r270
  text "C1" at 56.032,53.066 h2.54
  text "RX" at 27.407,52.68 h1.02 r90
  text "+5" at 22.53,52.578 h1.02 r90
  text "TX" at 29.896,52.502 h1.02 r90
  text "GND" at 24.994,52.451 h1.02 r90
  text "1A7" at 5.944,52.146 h1.02
  text "GND" at 26.759,48.412 h1.02 r315
  text "USB1" at 91.897,48.369 h2.54
  text "2A7" at 6.172,47.549 h1.02
  text "+5V_C" at 21.722,46.373 h1.02 r315
  text "MO" at 25.641,45.898 h1.02 r315
  text "2A6" at 6.172,45.212 h1.02
  text "AREF2" at 6.172,42.824 h1.02
  text "RST" at 33.058,41.935 h1.02 r315
  text "USB2" at 91.897,41.282 h2.54
  text "SCK" at 31.331,40.208 h1.02 r315
  text "GND" at 6.172,40.132 h1.02
  text "MO" at 0.559,38.76 h1.02 r270
  text "MI" at 29.603,38.176 h1.02 r315
  text "2D11" at 6.172,37.719 h1.02
  text "MI" at 0.533,36.093 h1.02 r270
  text "2D12" at 6.121,34.976 h1.02
  text "SCK" at 0.508,34.011 h1.02 r270
  text "2D13" at 6.172,32.436 h1.02
  text "PWM1 (D10)" at 6.096,29.794 h1.02
  text "PWM0 (2D9)" at 6.147,27.407 h1.02
  text "V_B2" at 99.5,26.187 h1.02 r90
  text "2D8" at 6.147,24.79 h1.02
  text "C2" at 56.032,23.983 h2.54
  text "RX" at 99.5,23.114 h1.02 r90
  text "TX" at 99.5,20.396 h1.02 r90
  text "Motor_4" at 42.951,20.25 h2.54
  text "Motor_3" at 17.755,20.218 h2.54
  text "RST" at 99.5,16.891 h1.02 r90
  text "C2_UART" at 91.466,16.866 h2.54 r90
  text "PWM3" at 55.855,15.265 h1.02 r270
  text "PWM2" at 58.369,15.265 h1.02 r270
  text "INT3" at 63.373,15.096 h1.02 r270
  text "INT2" at 65.811,15.096 h1.02 r270
  text "TX2" at 68.351,14.25 h1.02 r270
  text "RX2" at 71.171,14.25 h1.02 r270
  text "Designed By / Mind Cloud / 24-007-A" at 55.791,13.819 h1.6
  text "GND" at 99.5,13.132 h1.02 r90
  text "JLCJLCJLCJLC" at 2.725,11.945 h0.9
  text "M3_B" at 26.378,7.442 h1.02 r270
  text "M3_F" at 28.984,7.442 h1.02 r270
  text "M4_B" at 44.161,7.442 h1.02 r270
  text "M4_F" at 46.807,7.442 h1.02 r270
  text "RST2" at 90.602,7.341 h1.02 r270
  text "GND" at 19.068,6.427 h1.02 r270
  text "2A0" at 23.942,6.427 h1.02 r270
  text "GND" at 36.728,6.427 h1.02 r270
  text "2A2" at 41.683,6.427 h1.02 r270
  text "2D7" at 53.213,6.427 h1.02 r270
  text "2D6" at 55.786,6.427 h1.02 r270
  text "2D5" at 58.358,6.427 h1.02 r270
  text "2D4" at 60.931,6.427 h1.02 r270
  text "2D3" at 63.504,6.427 h1.02 r270
  text "2D2" at 66.076,6.427 h1.02 r270
  text "2D0" at 71.222,6.427 h1.02 r270
  text "2A0" at 74.473,6.427 h1.02 r270
  text "2A2" at 79.553,6.427 h1.02 r270
  text "2A3" at 82.144,6.427 h1.02 r270
  text "2A4" at 84.836,6.427 h1.02 r270
  text "2A5" at 87.224,6.427 h1.02 r270
  text "2A1" at 21.505,6.088 h1.02 r270
  text "2A1" at 39.206,6.088 h1.02 r270
  text "2D1" at 68.649,6.088 h1.02 r270
  text "2A1" at 76.911,6.088 h1.02 r270
  text "+5" at 31.59,5.411 h1.02 r270
  text "+5" at 49.454,5.411 h1.02 r270